# Altium PCB 00.Main.PcbDoc
Units mm, origin at the board's own origin, x right, y up, seen from the top; angles counter-clockwise.
Board outline 95 x 70 mm, 2 copper layers (Top Layer, Bottom Layer); 12 components, 14 nets, 86 pads, 5 vias.
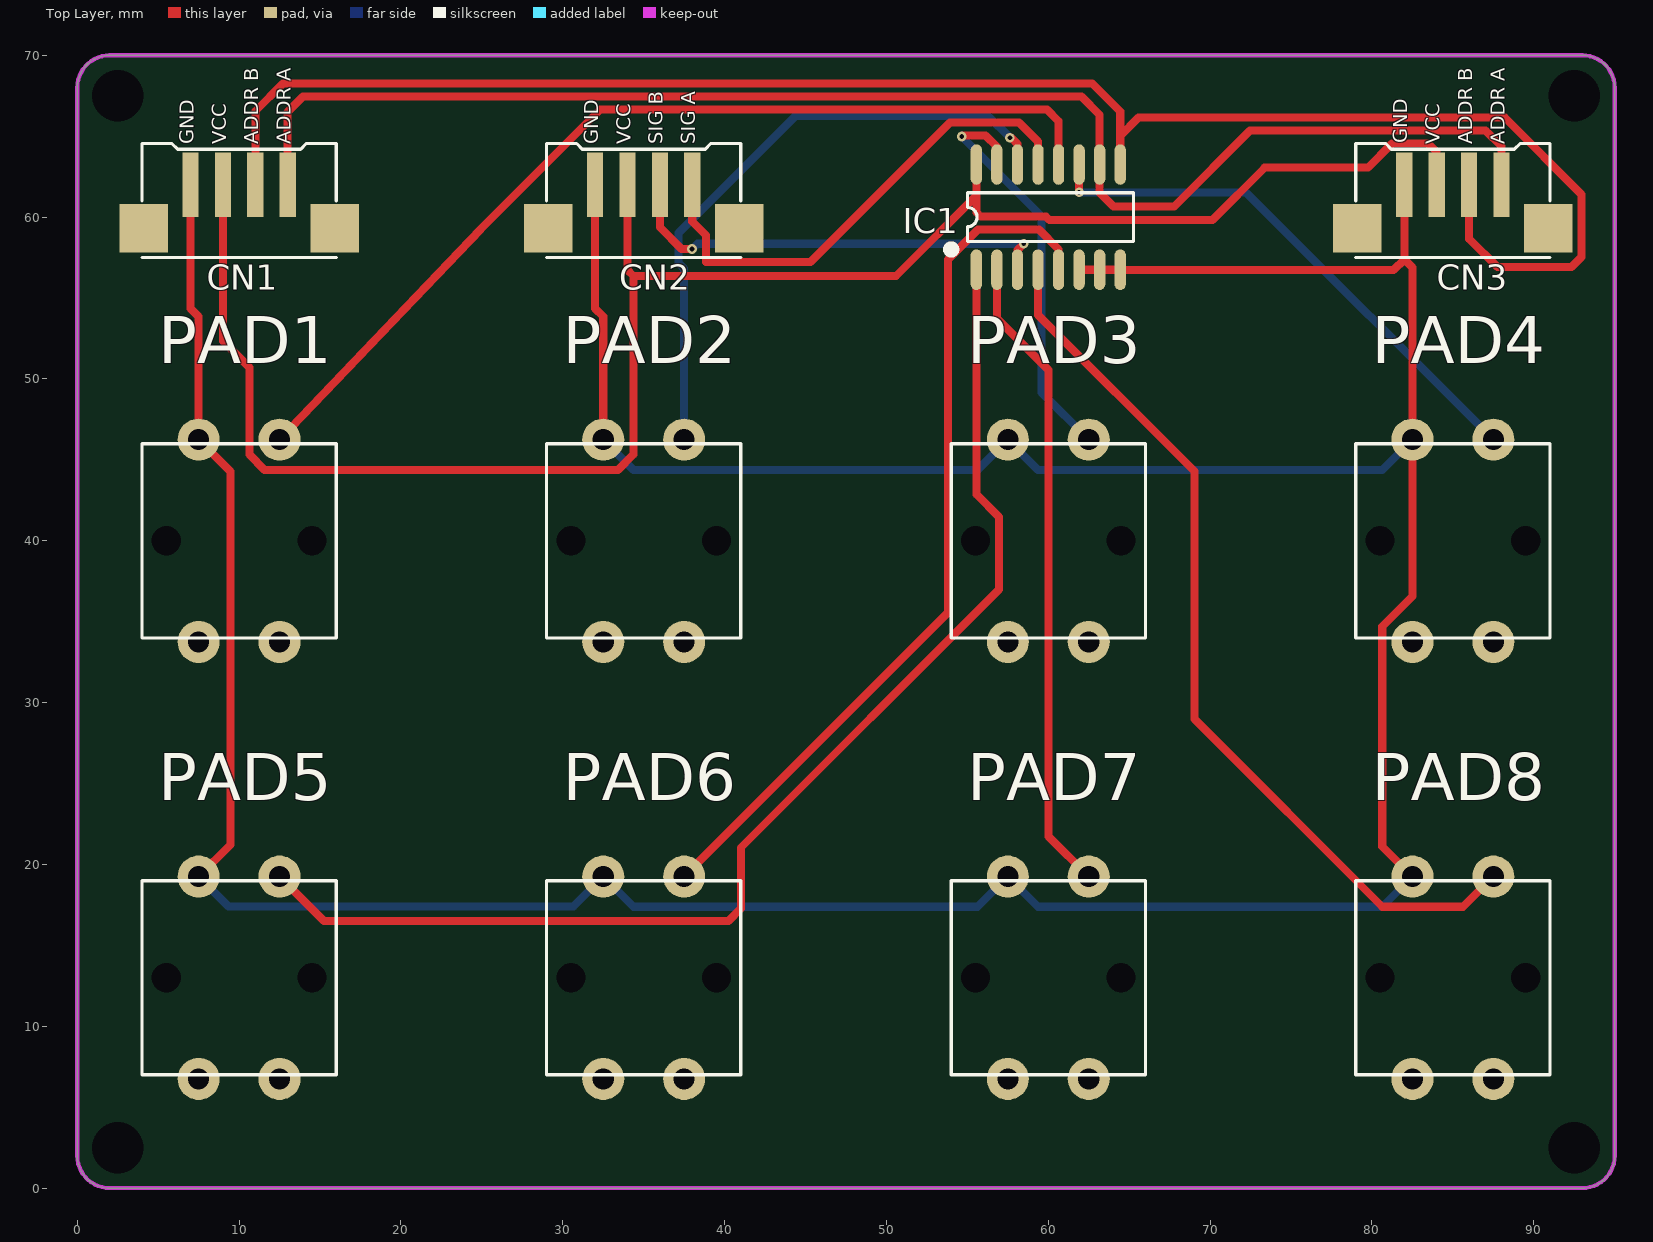
[diagram p0: Top Layer view]
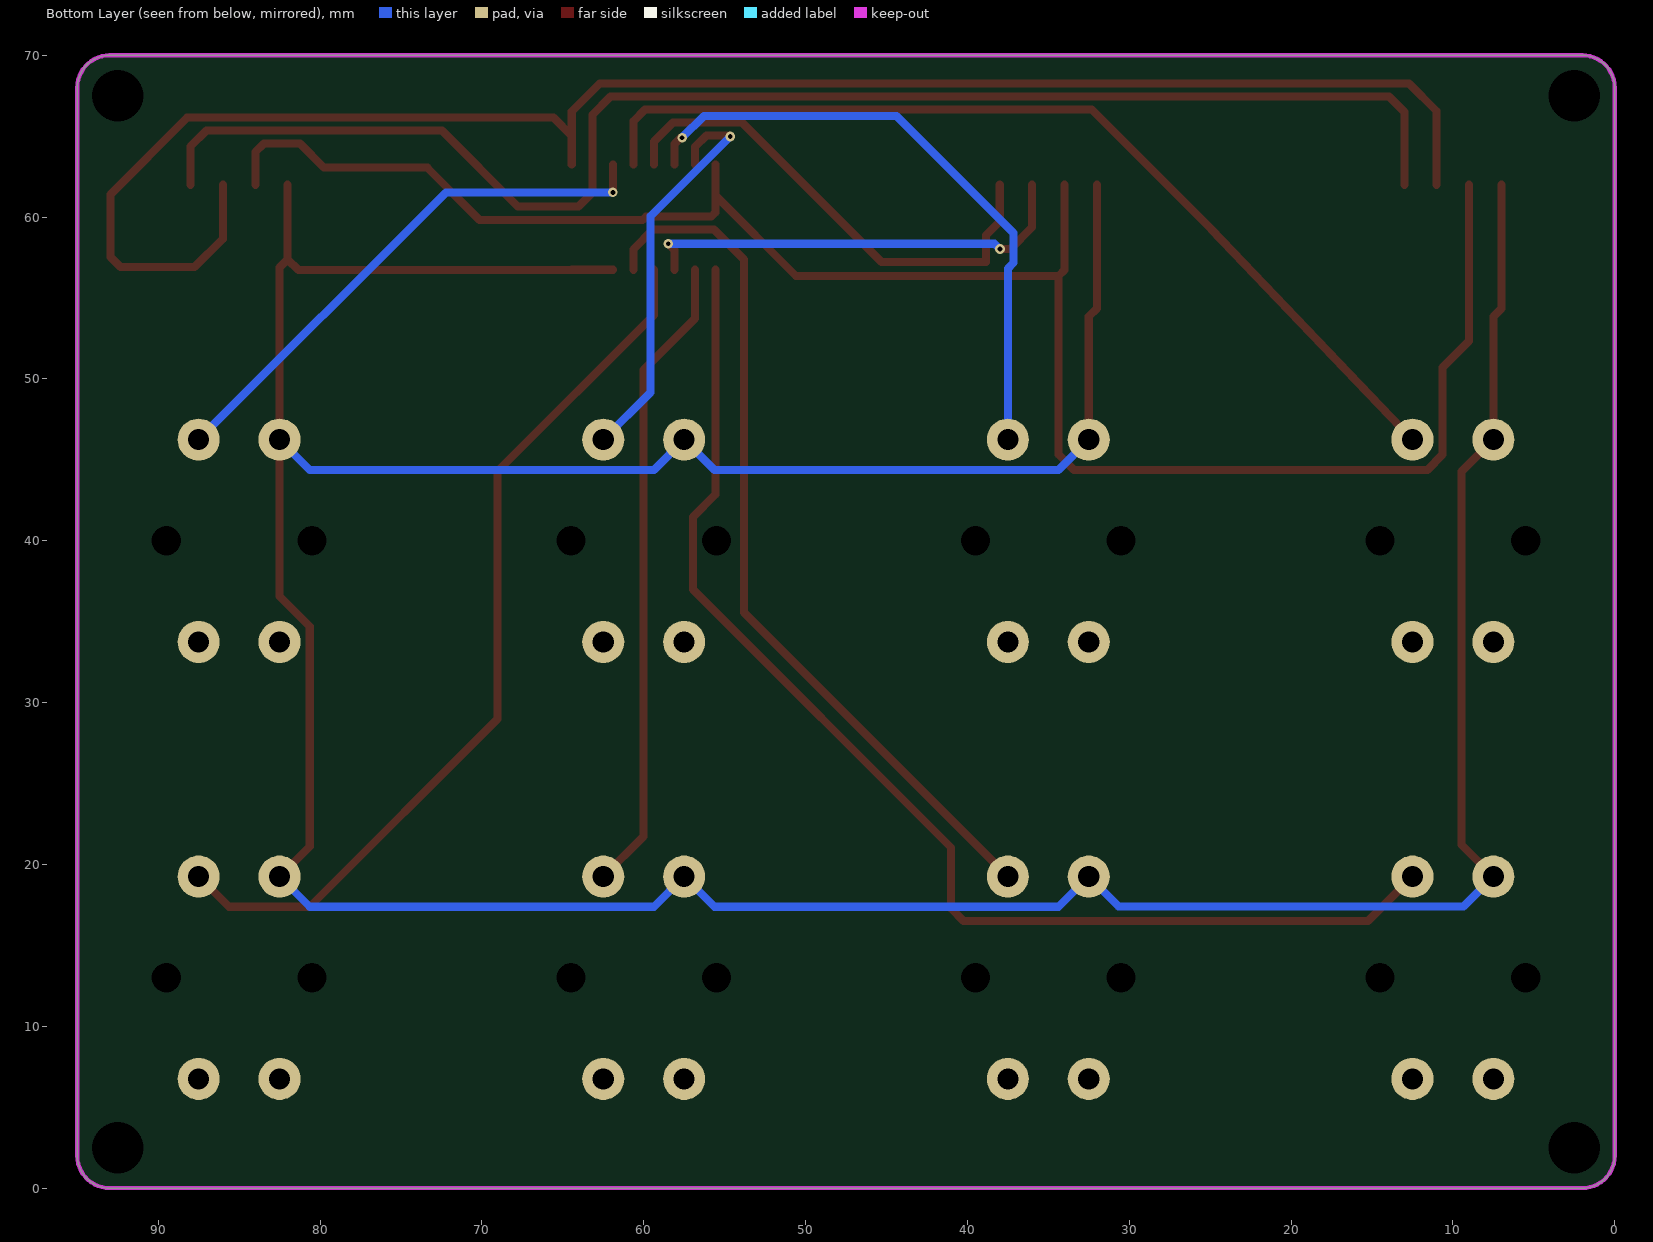
[diagram p1: Bottom Layer view, seen from below]

## Layer stack, top to bottom
Top Layer: signal copper 0.0356
Dielectric: dielectric 0.32, FR-4, Dk 4.8
Bottom Layer: signal copper 0.0356

## Board outline
0,2 0,68 cw(c2,68) 2,70 93,70 cw(c93,68) 95,68 95,2 cw(c93,2) 93,0 2,0 cw(c2,2)

## Design rules (kind name [scope] priority, off if disabled: settings)
Clearance [All] p1: gap=0.3
ComponentClearance [All] p1 off: gap=0.254 collisioncheckmode=3 verticalgap=0.254 showdistances=FALSE
HoleSize [All] p1: absolutevalues=TRUE maxlimit=30 minlimit=0.3 maxpercent=80.000 minpercent=20.000
PolygonConnect [All] p1: connectstyle=Relief reliefconductorwidth=0.5 reliefentries=4 polygonreliefangle="90 Angle" airgapwidth=0.5
RoutingVias [All] p1: holewidth=0.3 width=0.6 viastyle="Through Hole" minholewidth=0.3 minwidth=0.6 maxholewidth=0.3 maxwidth=0.6
SilkToSilkClearance [All] p1: silktosilkclearance=0
SilkToSolderMaskClearance [IsPad] p1: minsilkscreentomaskgap=0 clearancetoexposedcopper=TRUE
SolderMaskExpansion [All] p1: expansion=0.102
Width [All] p1: maxlimit=0.6 minlimit=0.3 preferedwidth=0.5 minimp=50.000000 maximp=50.000000 favimp=50.000000
24 further rules are at their usual default settings.

## Components (designator, comment, footprint, x,y, rotation, side; value= is the part's Value field where it differs from the comment)
CN1 "2.54mm 1X4" GROVE-4P-180D 10,62 r0 top (schematic designator CN3)
CN2 "2.54mm 1X4" GROVE-4P-180D 35,62 r0 top (schematic designator CN1)
CN3 "2.54mm 1X4" GROVE-4P-180D 85,62 r0 top
IC1 "HD74HC4052P" SOIC16 60,60 r90 top
PAD1 "HTS-2201T" ALPS-SKHC-12mm 10,40 r90 top
PAD2 "HTS-2201T" ALPS-SKHC-12mm 35,40 r90 top
PAD3 "HTS-2201T" ALPS-SKHC-12mm 60,40 r90 top
PAD4 "HTS-2201T" ALPS-SKHC-12mm 85,40 r90 top
PAD5 "HTS-2201T" ALPS-SKHC-12mm 10,13 r90 top
PAD6 "HTS-2201T" ALPS-SKHC-12mm 35,13 r90 top
PAD7 "HTS-2201T" ALPS-SKHC-12mm 60,13 r90 top
PAD8 "HTS-2201T" ALPS-SKHC-12mm 85,13 r90 top

## Footprints (in the part's own frame and the unit in brackets; to place one, negate y for a bottom-side part, rotate by r counter-clockwise, add the part's x,y. Pads: shape width x height; smd on the part's side, far side on the other; paste and mask are expansions set on the pad)
ALPS-SKHC-12mm [mm]
  round 2.6 hole 1.3: 1(6.25,2.5) 2(6.25,-2.5) ""(-6.25,-2.5) ""(-6.25,2.5)
  round 0 hole 1.8: ""(0,4.5) ""(0,-4.5)
  silkscreen extent -6,-6 6,6
GROVE-4P-180D [mm]
  rect 1x4 smd: 1(3,0) 2(1,0) 3(-1,0) 4(-3,0)
  rect 3x3 smd: ""(-5.9,-2.7) ""(5.9,-2.7)
  silkscreen extent -6,-4.5 6,2.55
SOIC16 [mm]
  oval 2.5x0.7 smd: 1(-3.25,4.445) 2(-3.25,3.175) 3(-3.25,1.905) 4(-3.25,0.635) 5(-3.25,-0.635) 6(-3.25,-1.905) 7(-3.25,-3.175) 8(-3.25,-4.445) 9(3.25,-4.445) 10(3.25,-3.175) 11(3.25,-1.905) 12(3.25,-0.635) 13(3.25,0.635) 14(3.25,1.905) 15(3.25,3.175) 16(3.25,4.445)
  silkscreen extent -2.25,-5.27 1.5,6.25

## Part data
CN1 CN2 CN3: library part "Connector 1X4"
IC1: library part TC74HC4052AF
PAD1 PAD2 PAD3 PAD4 PAD5 PAD6 PAD7 PAD8: library part "Tact Switch HTS-2201T"

## Free pads (board coordinates)
  round 0 hole 3.2: 0(2.5,67.5) 0(2.5,2.5) 0(92.5,2.5) 0(92.5,67.5)

## Via types
v1: diameter 0.6, hole 0.3, Top Layer to Bottom Layer, 5 vias

## Nets (pads, with @x,y where several pads share a name; then routed paths per layer and width w, separated by ;. In a path a pad name is that pad's centre, name@x,y a point inside that pad or via, vN(x,y) a via of type N, cw(c..) or ccw(c..) an arc to the next point about the centre after c; other vN are vias at no path point)
ADDR_A: CN1.1 CN3.1 IC1.10 | length 90.2
  Top Layer w0.5: CN1.1 13,66.5 13.95,67.45 62.05,67.45 63.175,66.325 IC1.10 63.175,61.516 64.024,60.667 67.784,60.667 72.467,65.35 87.025,65.35 88,64.375 CN3.1
ADDR_B: CN1.2 CN3.2 IC1.9 | length 108.8
  Top Layer w0.5: CN1.2 11,66.545 12.705,68.25 62.715,68.25 64.445,66.52 64.445,65.01 ; IC1.9 64.445,65.01 ; CN3.2 86,58.66 87.753,56.907 92.32,56.907 92.955,57.542 92.955,61.403 88.208,66.15 65.585,66.15 64.445,65.01
GND: CN1.4 CN2.4 CN3.4 IC1.6 IC1.7 IC1.8 PAD1.1 PAD2.1 PAD3.1 PAD4.1 PAD5.1 PAD6.1 PAD7.1 PAD8.1 | length 258.1
  Top Layer w0.5: CN1.4 7,54.359 7.5,53.859 PAD1.1 9.465,44.285 9.465,21.215 PAD5.1 ; CN2.4 32,54.359 32.5,53.859 PAD2.1 ; IC1.6 IC1.7 IC1.8 64.445,56.73 81.34,56.73 82,57.39 ; CN3.4 82,57.39 ; PAD8.1 80.636,21.114 80.636,34.708 82.5,36.572 PAD4.1 82.5,56.89 82,57.39
  Bottom Layer w0.5: PAD5.1 9.35,17.4 30.65,17.4 PAD6.1 34.365,17.385 55.635,17.385 PAD7.1 59.365,17.385 80.635,17.385 PAD8.1 ; PAD2.1 34.365,44.385 55.635,44.385 PAD3.1 59.365,44.385 80.635,44.385 PAD4.1
PAD1: IC1.12 PAD1.2 | length 59.7
  Top Layer w0.5: PAD1.2 24.934,59.27 32.314,66.65 59.913,66.65 60.635,65.928 IC1.12
PAD2: IC1.14 PAD2.2 | length 38.9
  Top Layer w0.5: v1(57.624,64.908) 57.712,64.908 58.095,64.526 IC1.14
  Bottom Layer w0.5: PAD2.2 37.5,56.82 37.139,57.181 37.139,59.013 44.381,66.255 56.277,66.255 v1(57.624,64.908)
PAD3: IC1.15 PAD3.2 | length 25.6
  Top Layer w0.5: v1(54.652,64.985) 54.717,65.05 56.125,65.05 56.825,64.35 IC1.15
  Bottom Layer w0.5: v1(54.652,64.985) 59.579,60.057 59.579,49.171 PAD3.2
PAD4: IC1.11 PAD4.2 | length 33.6
  Top Layer w0.5: v1(61.905,61.53) IC1.11
  Bottom Layer w0.5: v1(61.905,61.53) 72.22,61.53 PAD4.2
PAD5: IC1.1 PAD5.2 | length 76.6
  Top Layer w0.5: PAD5.2 15.25,16.5 40.229,16.5 41,17.271 41,21.031 56.963,36.994 56.963,41.464 55.555,42.872 IC1.1
PAD6: IC1.5 PAD6.2 | length 54.2
  Top Layer w0.5: PAD6.2 53.814,35.564 53.814,57.39 55.65,59.226 59.42,59.226 60.635,58.011 IC1.5
PAD7: IC1.2 PAD7.2 | length 39.9
  Top Layer w0.5: IC1.2 56.825,53.732 60.011,50.546 60.011,21.739 PAD7.2
PAD8: IC1.4 PAD8.2 | length 55.8
  Top Layer w0.5: IC1.4 59.365,53.961 69.028,44.298 69.028,28.993 80.636,17.385 85.635,17.385 PAD8.2
SIG_A: CN2.1 IC1.13 | length 31.1
  Top Layer w0.5: CN2.1 38,59.724 38.843,58.881 38.843,57.238 45.303,57.238 53.915,65.85 58.195,65.85 59.365,64.68 IC1.13
SIG_B: CN2.2 IC1.3 | length 27.6
  Top Layer w0.5: CN2.2 36,59.371 37.346,58.025 v1(37.989,58.025) ; IC1.3 58.095,57.963 v1(58.487,58.355)
  Bottom Layer w0.5: v1(37.989,58.025) 38.32,58.355 v1(58.487,58.355)
VCC: CN1.3 CN2.3 CN3.3 IC1.16 | length 117.7
  Top Layer w0.5: CN1.3 9,52.343 10.634,50.71 10.634,45.325 11.573,44.385 33.417,44.385 34.357,45.325 34.357,56.374 ; CN2.3 34,56.731 34.357,56.374 ; IC1.16 55.555,61.327 ; CN3.3 84,64.019 83.469,64.55 81.243,64.55 79.747,63.054 73.372,63.054 70.146,59.828 60.065,59.828 59.867,60.026 55.826,60.026 55.555,60.297 55.555,61.327 ; 34.357,56.374 50.602,56.374 55.555,61.327
pads on no net: CN1. CN2. CN3. PAD1. PAD2. PAD3. PAD4. PAD5. PAD6. PAD7. PAD8.

## Keep-outs
Keep-Out Layer:
  the board outline again, w0.254

## Silkscreen, mask and mechanical layers (free items; w line width, h text height)
Top Overlay:
  text "GND" at 82.5,64.55 h1.52 r90
  text "GND" at 7.5,64.5 h1.52 r90
  text "VCC" at 9.5,64.5 h1.52 r90
  text "ADDR B" at 11.5,64.5 h1.52 r90
  text "ADDR A" at 13.5,64.5 h1.52 r90
  text "GND" at 32.5,64.5 h1.5 r90
  text "VCC" at 34.5,64.5 h1.5 r90
  text "SIG B" at 36.5,64.5 h1.52 r90
  text "SIG A" at 38.5,64.5 h1.52 r90
  text "VCC" at 84.5,64.5 h1.52 r90
  text "ADDR B" at 86.5,64.5 h1.52 r90
  text "ADDR A" at 88.5,64.5 h1.52 r90
Mechanical 3:
  circle w0.2: c92.5,67.5 r1.3
  circle w0.2: c2.5,67.5 r1.3
  circle w0.2: c2.5,2.5 r1.3
  circle w0.2: c92.5,2.5 r1.3
  circle w0.2: c7.5,19.25 r1.8
  circle w0.2: c12.5,19.25 r1.8
  circle w0.2: c7.5,6.75 r1.8
  circle w0.2: c12.5,6.75 r1.8
  circle w0.2: c37.5,6.75 r1.8
  circle w0.2: c32.5,6.75 r1.8
  circle w0.2: c37.5,19.25 r1.8
  circle w0.2: c32.5,19.25 r1.8
  circle w0.2: c62.5,6.75 r1.8
  circle w0.2: c57.5,6.75 r1.8
  circle w0.2: c62.5,19.25 r1.8
  circle w0.2: c57.5,19.25 r1.8
  circle w0.2: c87.5,6.75 r1.8
  circle w0.2: c82.5,6.75 r1.8
  circle w0.2: c87.5,19.25 r1.8
  circle w0.2: c82.5,19.25 r1.8
  circle w0.2: c87.5,33.75 r1.8
  circle w0.2: c82.5,33.75 r1.8
  circle w0.2: c87.5,46.25 r1.8
  circle w0.2: c82.5,46.25 r1.8
  circle w0.2: c62.5,33.75 r1.8
  circle w0.2: c57.5,33.75 r1.8
  circle w0.2: c62.5,46.25 r1.8
  circle w0.2: c57.5,46.25 r1.8
  circle w0.2: c37.5,33.75 r1.8
  circle w0.2: c32.5,33.75 r1.8
  circle w0.2: c37.5,46.25 r1.8
  circle w0.2: c32.5,46.25 r1.8
  circle w0.2: c12.5,33.75 r1.8
  circle w0.2: c7.5,33.75 r1.8
  circle w0.2: c12.5,46.25 r1.8
  circle w0.2: c7.5,46.25 r1.8
  lines w0.2: -3.008,1.274 -2.5,-0.25 ; -3.008,68.726 -2.5,70.25 ; -2.754,-0.25 -2.246,-0.25 ; -2.754,70.25 -2.246,70.25 ; -2.5,28.5 -2.5,-0.25 ; -2.5,41.5 -2.5,70.25 ; -1.992,1.274 -2.5,-0.25 ; -1.992,68.726 -2.5,70.25 ; -0.25,72.246 -0.25,72.754 ; 1.274,71.992 -0.25,72.5 ; 1.274,73.008 -0.25,72.5 ; 41,72.5 -0.25,72.5 ; 54,72.5 95.25,72.5 ; 93.726,71.992 95.25,72.5 ; 93.726,73.008 95.25,72.5 ; 95.25,72.246 95.25,72.754 ; -0.25,2 ccw(c2,2) 2,-0.25 93,-0.25 ccw(c93,2) 95.25,2 95.25,68 ccw(c93,68) 93,70.25 2,70.25 ccw(c2,68) -0.25,68 -0.25,2
  text "95.5 (mm)" at 41.254,71.586 h1.52
  text "70.5 (mm)" at -1.586,28.754 h1.52 r90